# Altium PCB FCM_Integrated.PcbDoc (part 3 of 3)
Units mil, origin at the board's own origin, x right, y up, seen from the top; angles counter-clockwise.
Board outline 5855 x 4354 mil, 4 copper layers (Top Layer, Power, Ground, Bottom Layer), stack 23.756 mil thick; 164 components, 92 nets, 619 pads, 176 vias.
Unrouted connection lines stored in the file: 150.
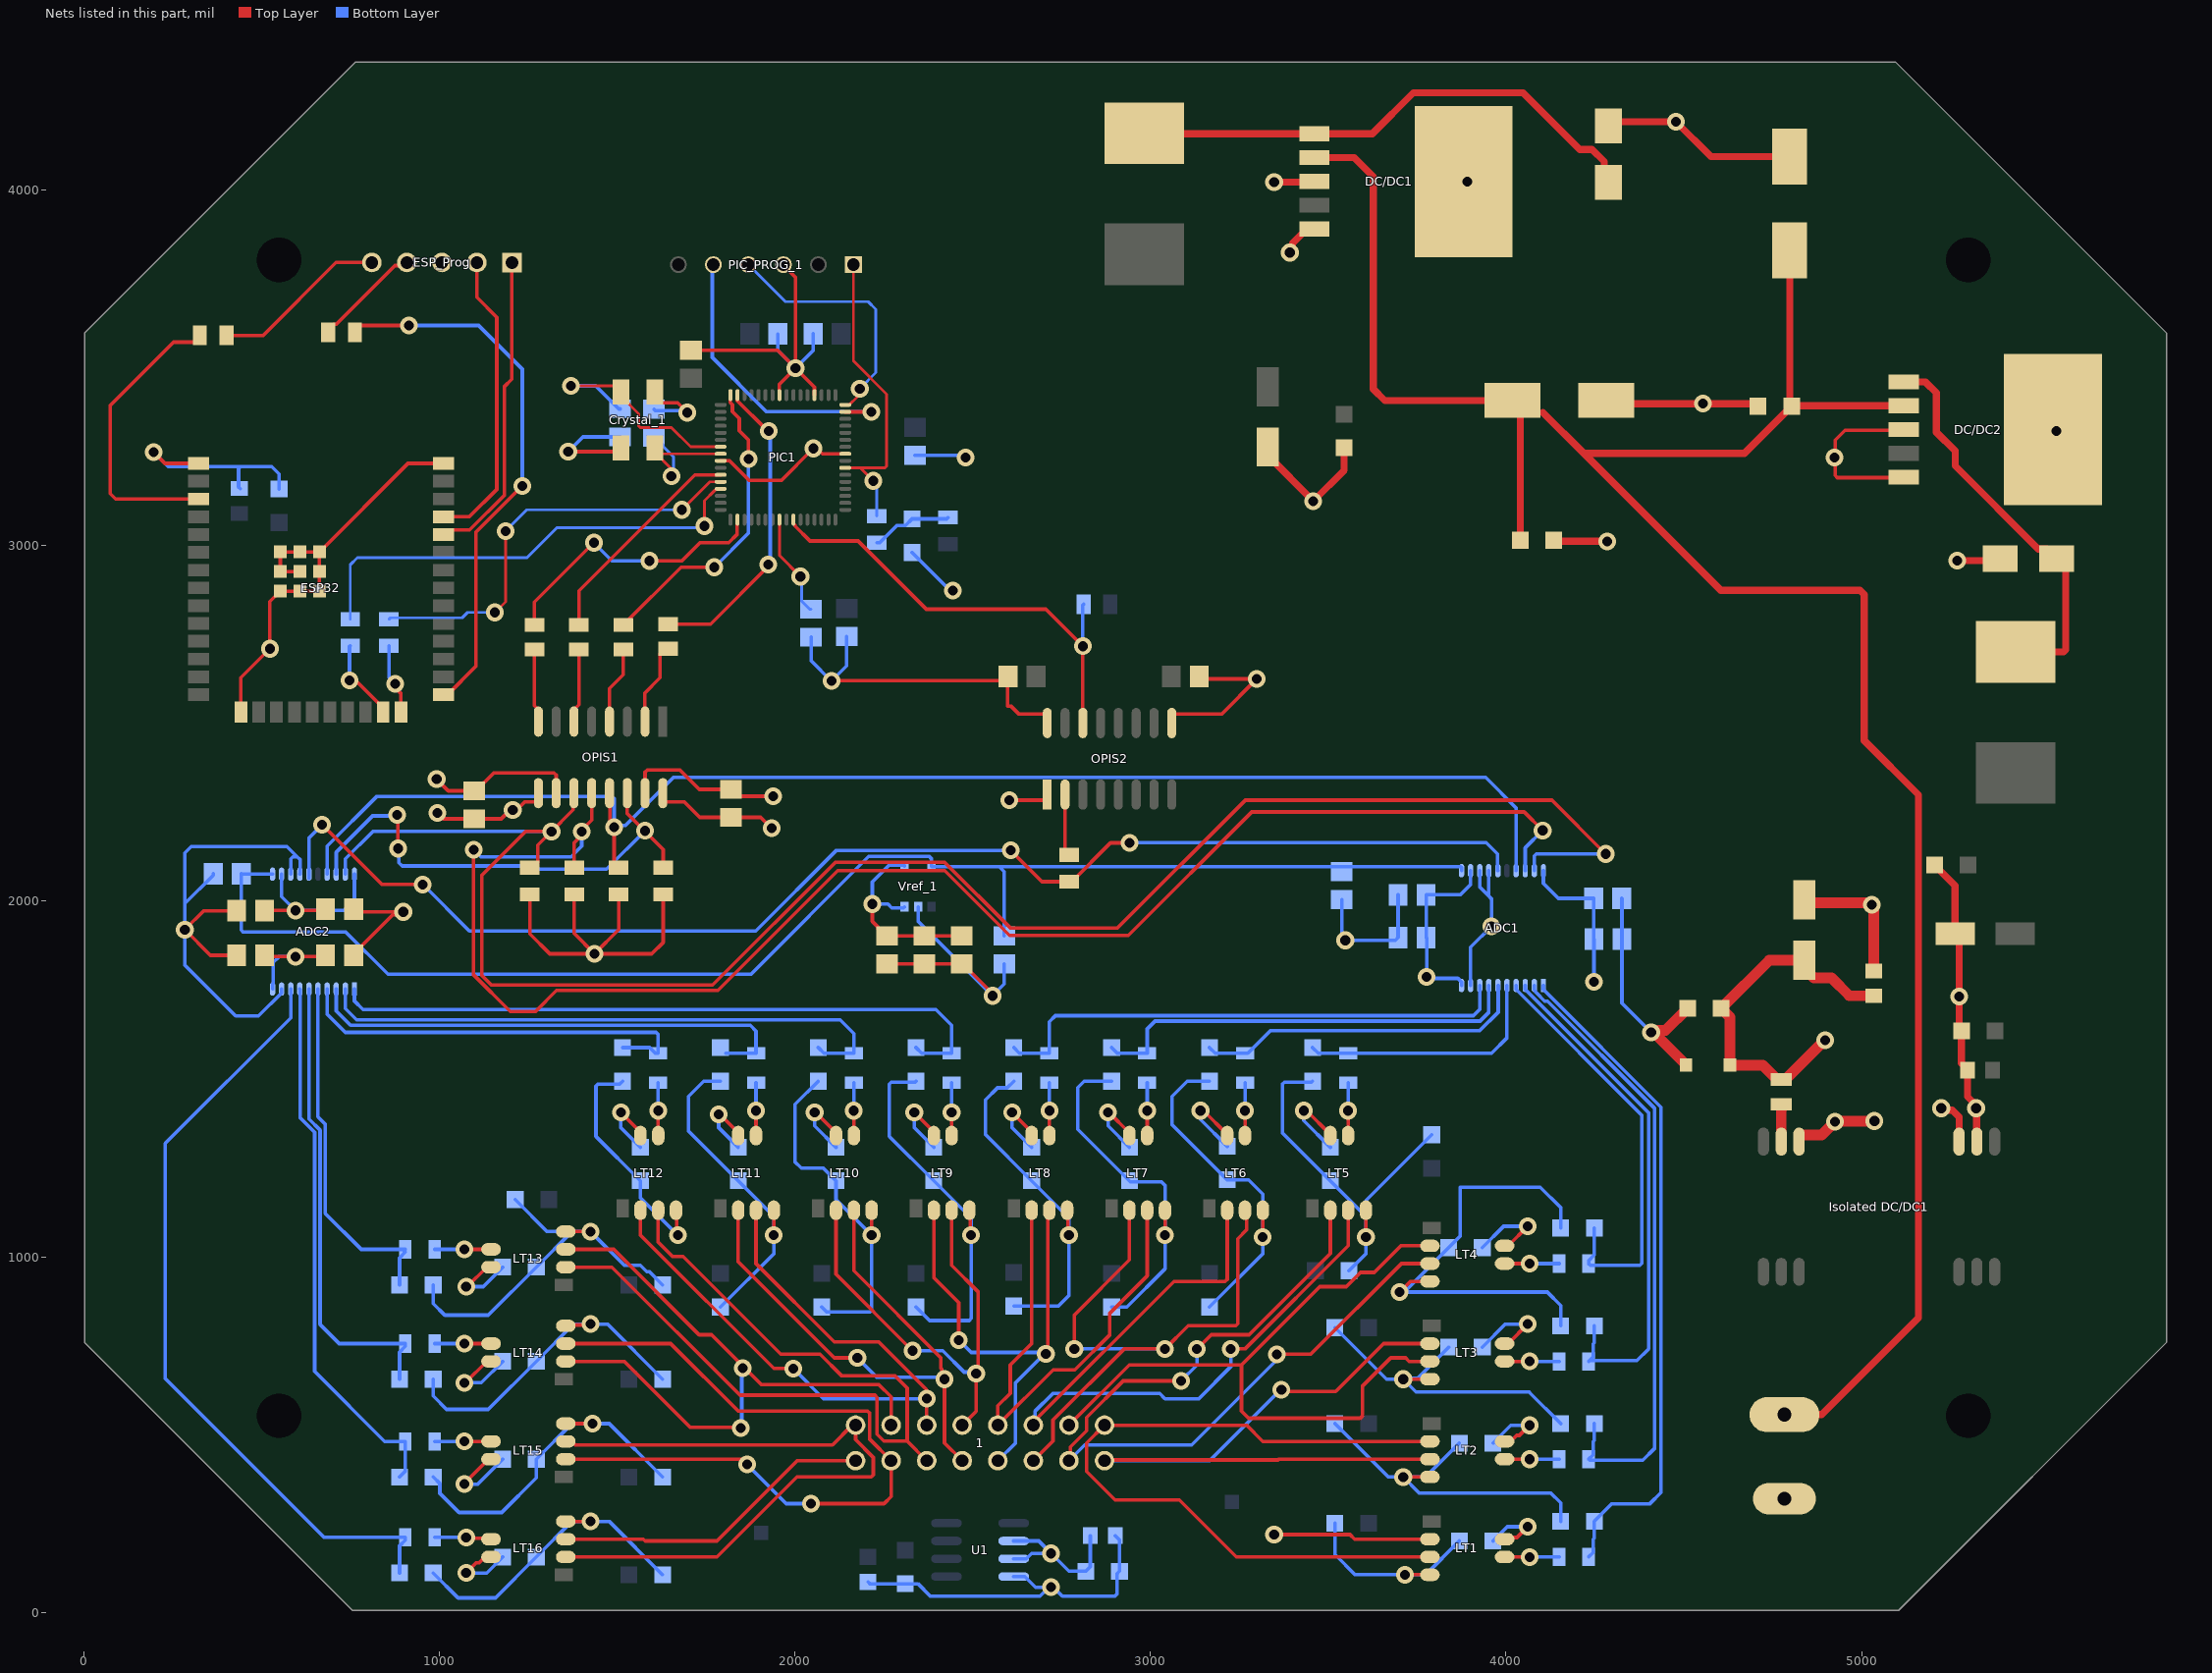
[diagram p4: the nets of this part, all layers, seen from the top]

## Via types
v1: diameter 50, hole 28, Top Layer to Bottom Layer, 176 vias

## Nets (pads, with @x,y where several pads share a name; then routed paths per layer and width w, separated by ;. In a path a pad name is that pad's centre, name@x,y a point inside that pad or via, vN(x,y) a via of type N, cw(c..) or ccw(c..) an arc to the next point about the centre after c; other vN are vias at no path point) (continued)
+5: *1.1 ADC1.10 ADC1.12 ADC1.20 ADC2.10 ADC2.12 ADC2.20 C1.1 C2.1 C3.2 C4.2 C5.2 C6.2 C10.1 C12.2 C13.2 C14.1 C15.1 C16.2 C17.2 C18.1 C19.1 C23.2 C26.2 C29.2 C32.2 C35.2 C38.2 C41.2 C44.2 C47.2 C49.2 C53.2 C55.2 C59.2 C61.2 C65.2 C67.2 C76.1 C77.1 C78.2 DIODE2.K LT1.7 LT2.7 LT3.7 LT4.7 LT5.7 LT6.7 LT7.7 LT8.7 LT9.7 LT10.7 LT11.7 LT12.7 LT13.7 LT14.7 LT15.7 LT16.7 OPIS1.10 OPIS1.15 OPIS2.1 R5.1 R6.1 R7.1 R8.1 U1.2 U1.3 Vref_1.3 Vref_1.4 | length 9463.3
  Top Layer w10: C15.1@509.37,1851.94 C15.1@509.37,1848 513.37,1844 v1(596,1844) 676.63,1844 C17.2@680.63,1848 ; C14.1@509.37,1973 510.37,1974 v1(596,1974) 676.63,1974 C16.2@680.63,1978 ; v1(993,2343) 1025.63,2310.37 C6.2@1099,2310.37 1102.94,2310.37 1153.57,2361 1323.14,2361 1329,2355.14 OPIS1.10@1329,2303.82 ; v1(1071,361) 1071,363.53 1138.47,431 LT15.7@1146,431 ; v1@1073.47,646 1133.47,706 LT14.7@1146,706 ; v1(1076,111) 1104.28,139.28 1112.46,139.28 1129.18,156 LT16.7@1146,156 ; v1(1076,916) 1078.47,916 1133.47,971 LT13.7@1146,971 ; R5.1@1255,2019 1255,1908 1311,1852 v1(1437,1852) ; R6.1@1380,2019 1380,1909 v1(1437,1852) ; R7.1@1505,2019 1505,1920 v1(1437,1852) ; v1(1511,1406) 1566,1351.03 LT12.7@1566,1341 ; OPIS1.15@1579,2303.82 1579,2363 1585,2369 1677,2369 1731.63,2314.37 1814,2314.37 1833.37,2295 v1(1939,2295) ; R8.1@1630,2019 1630,1884 1598,1852 v1(1437,1852) ; v1(1786,1401) 1788.53,1401 1841,1348.53 LT11.7@1841,1341 ; v1(2056,1406) 2058.53,1406 2116,1348.53 LT10.7@2116,1341 ; v1(2218,1992) 2218,1943.37 2233.49,1927.88 2233.49,1923.94 2255.06,1902.37 C13.2@2259,1902.37 C10.1@2364,1902.37 C12.2@2469,1902.37 ; v1(2336,1406) 2391,1351.03 LT9.7@2391,1341 ; v1(2603,2284) 2702.4,2284 2710,2291.6 OPIS2.1@2710,2299.82 ; v1(2611,1406) 2666,1351.03 LT8.7@2666,1341 ; v1(2881,1406) 2883.53,1406 2941,1348.53 LT7.7@2941,1341 ; v1@3149.29,1411 3216,1344.29 LT6.7@3216,1341 ; v1@3439.29,1411 3506,1344.29 LT5.7@3506,1341 ; LT1.7@3996,206 4000.78,210.78 4030.78,210.78 v1(4061,241) ; LT2.7@3996,481 4012.82,481 4029.54,497.72 4037.72,497.72 v1(4066,526) ; LT3.7@3996,756 4006.03,756 v1(4061,811) ; LT4.7@3996,1031 4006.03,1031 v1(4061,1086)
  Top Layer w30: v1(4897,1609) 4895.81,1609 4785.81,1499 *1.1@4774,1499 4762.19,1499 4722.19,1539 DIODE2.K@4629.94,1539 4629.94,1674.24 C78.2@4605.18,1699 4740.54,1834.35 C77.1@4839,1834.35 4839,1810.73 4865.5,1784.24 4915.32,1784.24 4965.56,1734 C76.1@5034,1734
  Bottom Layer w10: ADC2.10@531.46,1753 532.41,1753.95 532.41,1768.68 533,1769.27 533,1828 549,1844 v1(596,1844) ; ADC2.12@557.05,2075.83 557.05,2012.95 v1(596,1974) 732.77,1974 761.77,2003 ADC2.20@761.77,2075.83 ; v1(1071,361) 1108.76,361 C61.2@1178.76,431 ; v1(1071,646) 1118.76,646 C55.2@1178.76,706 ; v1(1076,111) 1133.76,111 C67.2@1178.76,156 ; v1(1076,916) 1123.76,916 C49.2@1178.76,971 ; v1(1511,1406) 1511,1363.24 C65.2@1566,1308.24 ; v1(1786,1401) 1786,1363.24 C59.2@1841,1308.24 ; v1(2056,1406) 2056,1368.24 C53.2@2116,1308.24 ; Vref_1.3@2309,1984 2306,1981 2273,1981 2262,1992 v1(2218,1992) 2218,2054 2266,2102 2306,2102 Vref_1.4@2309,2099 ; v1(2336,1406) 2336,1363.24 C47.2@2391,1308.24 ; v1(2611,1406) 2611,1363.24 C44.2@2666,1308.24 ; U1.3@2615.49,151 2650.67,151 2665.67,166 v1(2721,166) ; U1.2@2615.49,201 2686,201 v1(2721,166) ; C18.1@2831,216 2831,128.24 C19.1@2818.76,116 2771,116 v1(2721,166) ; v1(2881,1406) 2881,1368.24 C41.2@2941,1308.24 ; v1@3149.29,1411 v1(3141,1411) 3141,1386 C38.2@3216,1311 ; v1@3439.29,1411 v1(3431,1411) 3431,1383.24 C35.2@3506,1308.24 ; ADC1.10@3874.82,1763 3874.82,1772.88 3864.7,1783 3775.37,1783 v1(3777,1787) 3777,1896.37 C2.1@3775.37,1898 C4.2@3775.37,2018 3872,2018 3900.41,2046.41 ADC1.12@3900.41,2085.83 ; C29.2@3933.24,746 3998.24,811 v1(4061,811) ; C32.2@3933.24,1026 3993.24,1086 v1(4061,1086) ; C23.2@3963.24,201 4003.24,241 v1(4061,241) ; C26.2@3963.24,476 4013.24,526 v1(4066,526) ; ADC1.20@4105.13,2085.83 4105.13,2049.87 4147,2008 C3.2@4246.63,2008 4246.63,1893.63 C1.1@4247.26,1893 v1(4247.26,1773)
+12: C70.2 C71.1 C79.2 C80.1 DC/DC1.2 DC/DC2.2 J1.1 | length 6683.3
  Top Layer w20: DC/DC1.2@3460.92,4090.93 3573,4090.93 3627,4036.93 3627,3440 3659,3408 C71.1@4018.22,3408 ; C70.2@4039.76,3015 4040,3015 C71.1@4040,3408 ; 4103.75,3374.25 4219,3259 ; J1.1@4783,556.2 4888,556.2 5160,828.2 5160,2299 5007,2452 5007,2862.49 4995.28,2874.21 4603.79,2874.21 4219,3259 ; C80.1@4798,3830 4798,3392 C79.2@4803.25,3392 ; DC/DC2.2@5117.92,3392.93 4804.17,3392.93 C79.2@4803.25,3392 ; 4219,3259 4670.25,3259 C79.2@4803.25,3392
CathH1: OPIS1.2 R4.1 | length 237.4
  Top Layer w10: OPIS1.2@1579,2505 1578,2506 1578,2585 1621.44,2628.44 1621.44,2695.31 1636.13,2710 R4.1@1644,2710
CathH2: OPIS1.4 R3.1 | length 219
  Top Layer w10: OPIS1.4@1479,2505 1479,2598 1517.94,2636.94 R3.1@1517.94,2707.91
CathH3: OPIS1.6 R2.1 | length 208.7
  Top Layer w10: OPIS1.6@1379,2505 1379,2539.03 1392.94,2552.97 R2.1@1392.94,2707.91
CathH4: OPIS1.8 R1.1 | length 207.5
  Top Layer w10: R1.1@1267.94,2707.91 1267.94,2550.1 1279,2539.03 OPIS1.8@1279,2505
CathL1: OPIS2.2 R11.2 | length 174.4
  Top Layer w10: OPIS2.2@2760,2299.82 2760,2141 R11.2@2771,2130
Cell_1_Voltage: ADC1.1 C24.2 R16.2 | length 1891
  Bottom Layer w10: ADC1.1@4105.13,1763 4105.13,1751.78 4436,1420.91 4436,336.86 4404.88,305.74 4297.98,305.74 C24.2@4248.24,256 4248.24,208.58 4245.05,205.39 4245.05,168.72 R16.2@4232.34,156
Cell_2_Voltage: ADC1.2 C27.2 R17.2 | length 1753.4
  Bottom Layer w10: ADC1.2@4079.54,1763 4079.54,1750.44 4082.02,1747.96 4082.02,1745.98 4087.65,1740.35 4087.65,1740.16 4108.81,1719 4116.7,1719 4417.35,1418.35 4417.35,460.35 4385,428 4235.34,428 R17.2@4232.34,431 4245.05,443.72 4245.05,480.39 4248.24,483.58 C27.2@4248.24,531
Cell_3_Voltage: ADC1.3 C30.2 R18.2 | length 1452.7
  Bottom Layer w10: ADC1.3@4053.95,1763 4053.95,1751.78 4401,1404.73 4401,741 4368,708 R18.2@4234.34,708 ; R18.2@4232.34,706 R18.2@4234.34,708 ; C30.2@4248.24,806 4248.24,758.58 4245.05,755.39 4245.05,718.72 R18.2@4234.34,708
Cell_4_Voltage: ADC1.4 C33.2 R19.2 | length 1188.4
  Bottom Layer w10: ADC1.4@4028.36,1763 4028.36,1751.78 4382,1398.14 4382,981.86 4376.14,976 4237.34,976 R19.2@4232.34,981 4232.34,988.87 4248.24,1004.78 C33.2@4248.24,1081
Cell_5_Voltage: ADC1.5 C36.2 R20.2 | length 718.6
  Bottom Layer w10: C36.2@3456,1588.24 3471.91,1572.34 R20.2@3556,1572.34 3959.34,1572.34 4002.77,1615.77 ADC1.5@4002.77,1763
Cell_6_Voltage: ADC1.6 C39.2 R21.2 | length 941.9
  Bottom Layer w10: C39.2@3166,1588.24 3181.91,1572.34 R21.2@3266,1572.34 3273.87,1572.34 3337.99,1636.46 3926.6,1636.46 3978,1687.86 3978,1762.18 ADC1.6@3977.18,1763
Cell_7_Voltage: ADC1.7 C42.2 R22.2 | length 1230.5
  Bottom Layer w10: C42.2@2891,1588.24 2906.91,1572.34 R22.2@2991,1572.34 2991,1641 3013,1663 3927,1663 3951.59,1687.59 ADC1.7@3951.59,1763
Cell_8_Voltage: ADC1.8 C45.2 R23.2 | length 1486.7
  Bottom Layer w10: C45.2@2616,1588.24 2631.91,1572.34 R23.2@2716,1572.34 2716,1661 2733,1678 3908,1678 3926,1696 ADC1.8@3926,1763
Cell_9_Voltage: ADC2.1 C50.2 R24.2 | length 1926.5
  Bottom Layer w10: ADC2.1@761.77,1753 761.77,1719.3 785.92,1695.15 2396.85,1695.15 2441,1651 R24.2@2441,1572.34 2356.91,1572.34 C50.2@2341,1588.24
Cell_10_Voltage: ADC2.2 C56.2 R26.2 | length 1676.2
  Bottom Layer w10: ADC2.2@736.18,1753 736.18,1697.82 768,1666 2128,1666 2166,1628 R26.2@2166,1572.34 2081.91,1572.34 C56.2@2066,1588.24
Cell_11_Voltage: ADC2.3 C62.2 R28.2 | length 1412.1
  Bottom Layer w10: ADC2.3@710.59,1753 710.59,1691.41 751,1651 1875,1651 1891,1635 R28.2@1891,1572.34 C62.2@1806.91,1572.34
Cell_12_Voltage: ADC2.4 C68.2 R30.2 | length 1184.9
  Bottom Layer w10: ADC2.4@685,1753 685,1682 736,1631 1610.14,1631 1616,1625.14 R30.2@1616,1572.34 1608.13,1572.34 1592.22,1588.24 C68.2@1516,1588.24
Cell_13_Voltage: ADC2.5 C51.2 R25.2 | length 1010.6
  Bottom Layer w10: ADC2.5@659.41,1753 659,1752.59 659,1394 680,1373 680,1122 781,1021 R25.2@904.66,1021 ; C51.2@888.76,921 888.76,997.22 904.66,1013.13 R25.2@900.73,1017.06
Cell_14_Voltage: ADC2.6 C57.2 R27.2 | length 1324.5
  Bottom Layer w10: ADC2.6@633.82,1753 633.82,1387.4 665,1356.21 665,810 719,756 R27.2@904.66,756 904.66,748.13 888.76,732.22 C57.2@888.76,656
Cell_15_Voltage: ADC2.7 C63.2 R29.2 | length 1535.2
  Bottom Layer w10: ADC2.7@608.23,1753 609,1752.23 609,1391 650,1350 650,678 847,481 R29.2@904.66,481 904.66,396.91 C63.2@888.76,381
Cell_16_Voltage: ADC2.8 C69.2 R31.2 | length 2207.5
  Bottom Layer w10: ADC2.8@582.64,1753 582.64,1671.64 230,1319 230,658 677,211 R31.2@904.66,211 904.66,203.13 888.76,187.22 C69.2@888.76,111
Chipsel1_HS: ADC1.18 OPIS1.12 R6.2 | length 4534.8
  Top Layer w10: v1(1097,2145) 1097,1792.79 1199.79,1690 1271,1690 1330,1749 1784,1749 2121,2086 2422,2086 2604,1904 2938,1904 3285,2251 4051,2251 v1(4103,2199) ; R6.2@1380,2094 1380,2164.43 1405,2189.43 1405,2204.57 1429,2228.57 OPIS1.12@1429,2303.82
  Bottom Layer w10: v1(1097,2145) 1117,2125 1371,2125 1401,2155 v1(1401,2196) ; ADC1.18@4053.95,2085.83 4053.95,2149.95 v1(4103,2199)
Chipsel1_LS: PIC1.43 R2.2 | length 629.8
  Top Layer w10: R2.2@1392.94,2776.81 1392.94,2872.94 1718.95,3198.95 PIC1.43@1791.61,3198.95
Chipsel2_HS: ADC2.18 OPIS1.14 R8.2 | length 1475.8
  Top Layer w10: v1(882,2243) 883.5,2241.5 883.5,2149.5 v1(885,2148) ; OPIS1.14@1529,2303.82 1529,2246 ; v1(1579,2198) 1529,2246 ; R8.2@1630,2094 1630,2145 1529,2246
  Bottom Layer w10: ADC2.18@710.59,2075.83 710.59,2137.59 813,2240 v1@880,2240 ; v1(885,2148) 887,2146 887,2108 896,2099 1261.41,2099 1270.41,2090 1471,2090 v1(1579,2198)
Chipsel2_LS: PIC1.31 R4.2 | length 873.1
  Top Layer w10: R4.2@1644,2778.9 1762.9,2778.9 1932,2948 v1@1931,2949 ; PIC1.31@1837.32,3417.95 1837.32,3408.68 v1@1920,3326
  Bottom Layer w10: v1@1920,3326 1930,3326 1931,3325 v1@1931,2949
  other v1: 1925,2947 1927,3322
D_CLK_LS: PIC1.50 R1.2 | length 791.6
  Top Layer w10: R1.2@1267.94,2776.81 1267.94,2840.94 v1(1434.95,3007.95) ; v1(1591,2957) 1682.6,2957 1733.55,3007.95 1814.33,3007.95 1837.32,3030.94 1837.32,3065.43 PIC1.50@1839.24,3067.34
  Bottom Layer w10: v1(1434.95,3007.95) 1485.9,2957 v1(1591,2957)
D_In_HS: ADC1.17 ADC2.17 OPIS1.13 R7.2 | length 4053.4
  Top Layer w10: OPIS1.13@1479,2303.82 1480.33,2302.49 1480.33,2216.49 1492,2204.82 1492,2107 R7.2@1505,2094
  Bottom Layer w10: ADC2.17@685,2075.83 685,2155 824,2294 1486.14,2294 1492,2288.14 v1(1492,2208) 1496.78,2212.78 1523.78,2212.78 1659,2348 3943,2348 4028,2263 4028,2086.2 ADC1.17@4028.36,2085.83
D_in_LS: PIC1.32 R3.2 | length 863.4
  Top Layer w10: R3.2@1517.94,2776.81 1680.1,2938.98 v1(1774.1,2938.98) ; PIC1.32@1818.16,3417.95 1818.16,3402.4 1824.82,3395.74 1824.82,3376.81 1844,3357.63 1844,3323.14 1869.89,3297.25 v1(1869.89,3243.61)
  Bottom Layer w10: v1(1774.1,2938.98) 1869.89,3034.77 v1(1869.89,3243.61)
D_out_HS: ADC1.15 ADC2.15 R11.1 | length 3831.6
  Top Layer w10: v1(671,2215) 839,2047 v1(954,2047) ; v1(2607,2143) 2695,2055 R11.1@2771,2055 2778.87,2055 2887.87,2164 v1(2941,2164)
  Bottom Layer w10: ADC2.15@633.82,2064.61 ADC2.15@633.82,2075.83 633.82,2177.82 v1(671,2215) ; v1(954,2047) 1085,1916 1890.33,1916 2117.33,2143 v1(2607,2143) ; v1(2941,2164) 2942,2165 3943.95,2165 3976,2132.95 3976,2101.74 3976.23,2101.51 3976.23,2086.78 ADC1.15@3977.18,2085.83
D_out_L: OPIS2.14 PIC1.58 R9.1 | length 1303.8
  Top Layer w10: PIC1.58@1996.33,3072.96 1996.33,3061.46 2000.5,3057.29 2000.5,3055.31 2042.82,3013 2178,3013 2370,2821 2706,2821 v1(2810,2717) OPIS2.14@2810,2501
  Bottom Layer w10: v1(2810,2717) 2810,2833 R9.1@2812,2835
DCLK_HS: ADC1.19 ADC2.19 OPIS1.11 R5.2 | length 5295.4
  Top Layer w10: R5.2@1255,2094 1262.87,2094 1277.56,2108.69 1277.56,2157.56 v1(1316,2196) ; OPIS1.11@1379,2303.82 1376.43,2301.25 1376.43,2257.43 1342,2223 1342,2222 v1(1316,2196) ; v1(4280,2133) 4129,2284 3267,2284 2908,1925 2606,1925 2422,2109 2114,2109 1769,1764 1147,1764 1120,1791 1120,2073 1243,2196 v1(1316,2196)
  Bottom Layer w10: ADC2.19@736.18,2075.83 736.18,2119 813.18,2196 v1(1316,2196) ; ADC1.19@4079.54,2085.83 4079.54,2127.14 4085.4,2133 v1(4280,2133)
ESP_Boot_D: ESP32.25 R32.1 | length 1546.2
  Top Layer w10: R32.1@763,3600 763,3604.31 777.69,3619 v1(915,3619) ; ESP32.25@1012,2581 1023.81,2581 1103,2660.19 1103,3037 v1(1234,3168)
  Bottom Layer w10: v1(915,3619) 1111,3619 1234,3496 v1(1234,3168)
ESP_Boot_P: ESP_Prog.4 R32.2 | length 306.9
  Top Layer w10: R32.2@688,3600 688,3607.87 702.69,3622.56 710.56,3622.56 875.39,3787.39 900.54,3787.39 ESP_Prog.4@909.15,3796
ESP_Enable_D: ESP32.3 R15.2 | length 838.4
  Top Layer w10: ESP32.3@323.02,3131 90,3131 75,3146 75,3394 253,3572 312.31,3572 327,3586.69 R15.2@327,3591
ESP_Enable_P: ESP_Prog.5 R15.1 | length 493.6
  Top Layer w10: R15.1@402,3591 505.12,3591 710.12,3796 ESP_Prog.5@810.72,3796
ESP_TX_BOOT: ESP32.35 ESP_Prog.2 | length 843.1
  Top Layer w10: ESP32.35@1012,3081 1085,3081 1162,3158 1162,3642 1106,3698 ESP_Prog.2@1106,3796
ESPout-PICin: PIC1.44 R10.2 | length 1209.2
  Top Layer w8: v1(1157,2812) 1187,2842 v1(1187,3041) ; v1(1682.6,3100.52) 1761.34,3179.26 PIC1.44@1791.61,3179.26
  Bottom Layer w8: R10.2@859,2793 863,2797 1065,2797 1080,2812 v1(1157,2812) ; v1(1187,3041) 1246.52,3100.52 v1(1682.6,3100.52)
GND: 
GND_H: "Isolated DC/DC1.4" ADC1.9 ADC1.13 ADC1.14 ADC2.9 ADC2.13 ADC2.14 C1.2 C2.2 C3.1 C4.1 C5.1 C6.1 C10.2 C11.1 C12.1 C13.1 C14.2 C15.2 C16.1 C17.1 C18.2 C19.2 C20.1 C21.2 C22.1 C23.1 C24.1 C25.1 C26.1 C27.1 C28.1 C29.1 C30.1 C31.1 C32.1 C33.1 C34.1 C35.1 C36.1 C37.1 C38.1 C39.1 C40.1 C41.1 C42.1 C43.1 C44.1 C45.1 C46.1 C47.1 C48.1 C49.1 C50.1 C51.1 C52.1 C53.1 C54.1 C55.1 C56.1 C57.1 C58.1 C59.1 C60.1 C61.1 C62.1 C63.1 C64.1 C65.1 C66.1 C67.1 C68.1 C69.1 C76.2 C77.2 C78.1 C93.1 C94.1 DIODE2.A LT1.2 LT1.4 LT2.4 LT3.4 LT4.4 LT5.4 LT6.4 LT7.4 LT8.4 LT9.4 LT10.4 LT11.4 LT12.4 LT13.4 LT14.4 LT15.4 LT16.4 OPIS1.9 OPIS1.16 U1.4 Vref_1.2 | length 22721.8
  Top Layer w10: C15.2@430.63,1848 357,1848 v1(285,1920) 338,1973 C14.2@430.63,1973 ; C17.1@759.37,1848 759.37,1851.94 869.78,1962.35 891.35,1962.35 v1(899,1970) 767.37,1970 C16.1@759.37,1978 ; v1(995,2248) 1011.37,2231.63 C6.1@1099,2231.63 1174.8,2231.63 1199.17,2256 v1(1207,2256) 1217.77,2256 1240.67,2278.9 1271.98,2278.9 1279,2285.92 OPIS1.9@1279,2303.82 ; LT16.4@1356,256 v1(1426,256) ; LT15.4@1356,531 v1(1431,531) ; LT14.4@1356,806 1358.5,808.5 1423.5,808.5 v1(1426,811) ; LT13.4@1356,1071 v1(1426,1071) ; OPIS1.16@1629,2303.82 1629,2285.92 1636.02,2278.9 1689.67,2278.9 1732.93,2235.63 C5.1@1820,2235.63 1904.37,2235.63 v1(1935,2205) ; LT12.4@1666,1131 1668.5,1128.5 v1@1668.5,1063.5 ; v1(1941,1061) LT11.4@1941,1131 ; v1(2216,1061) LT10.4@2216,1131 ; C13.1@2259,1823.63 C10.2@2364,1823.63 C12.1@2469,1823.63 2472.94,1823.63 v1@2556,1740.57 ; LT9.4@2491,1131 2493.5,1128.5 2493.5,1063.5 v1(2496,1061) ; LT8.4@2766,1131 2768.5,1128.5 2768.5,1063.5 v1(2771,1061) ; v1(3041,1061) LT7.4@3041,1131 ; v1(3316,1056) LT6.4@3316,1131 ; v1(3348,219) 3561.33,219 3574.33,206 LT1.2@3786,206 ; v1(3606,1056) LT5.4@3606,1131 ; v1(3701,901) 3731,931 LT4.4@3786,931 ; v1(3711,381) LT2.4@3786,381 ; v1(3711,656) LT3.4@3786,656 ; v1(3716,106) LT1.4@3786,106
  Top Layer w30: DIODE2.A@4505.93,1539 4505.93,1539.98 4414.91,1631 v1(4408,1631) 4413.31,1636.31 4448,1636.31 C78.1@4510.69,1699 ; 4824,1324 4824,1332.69 4833.93,1342.62 4887.62,1342.62 v1(4925,1380) 4926,1381 5035,1381 v1(5036,1382) ; C77.2@4839,2003.65 4846.65,1996 5022,1996 5034,1984 C76.2@5034,1804
  Bottom Layer w10: C94.1@364.63,2077 364.63,2073.06 285,1993.43 ; ADC2.9@557.05,1753 557.05,1741.78 492.27,1677 428,1677 285,1820 v1(285,1920) 285,1993.43 ; ADC2.13@582.64,2075.83 582.64,2119.14 588.5,2125 601,2125 ; ADC2.14@608.23,2075.83 609,2076.61 609,2117 601,2125 ; C69.1@983.24,111 1053.24,41 1158.24,41 C67.1@1273.24,156 1373.24,256 v1(1426,256) 1478.24,256 C66.1@1628.24,106 ; C63.1@983.24,381 1001.87,362.38 1001.87,335.13 1056,281 1176,281 1273.24,378.24 C61.1@1273.24,431 1373.24,531 v1(1431,531) 1478.24,531 C60.1@1628.24,381 ; C57.1@983.24,656 983.24,608.76 1021,571 1138.24,571 C55.1@1273.24,706 1378.24,811 v1(1426,811) 1473.24,811 C54.1@1628.24,656 ; C51.1@983.24,921 983.24,868.76 1016,836 1138.24,836 C49.1@1273.24,971 1373.24,1071 ; C64.1@1213.76,1161 1303.76,1071 1373.24,1071 ; C68.1@1516,1493.76 1508.24,1486 1446.86,1486 1441,1480.14 1441,1338.76 C65.1@1566,1213.76 1566,1166 v1(1671,1061) ; C48.1@1628.24,921 1591.43,957.81 1584.19,957.81 1566,976 1521,976 v1(1426,1071) 1373.24,1071 ; C58.1@1791,858.76 1941,1008.76 v1(1941,1061) 1941,1113.76 C59.1@1841,1213.76 1701,1353.76 1701,1451 1743.76,1493.76 C62.1@1791,1493.76 ; C56.1@2066,1493.76 2001,1428.76 2001,1266.86 2018.24,1249.62 2080.14,1249.62 C53.1@2116,1213.76 2116,1161 v1(2216,1061) 2216,851 2216.86,850.14 2211.86,845.14 2089.61,845.14 C52.1@2076,858.76 ; C21.2@2206,86 2211.25,80.75 C20.1@2311,80.75 2346.25,80.75 2381,46 2689.43,46 v1@2714.43,71 ; C46.1@2341,858.76 2378.76,821 2490.14,821 2496,826.86 v1(2496,1061) 2496,1108.76 C47.1@2391,1213.76 2266,1338.76 2266,1485.14 2271.86,1491 2338.24,1491 C50.1@2341,1493.76 ; Vref_1.2@2347,1984 2347,1943 v1(2556,1734) ; v1@2556,1740.57 v1(2556,1734) ; C11.1@2589,1823.63 2589,1767 v1(2556,1734) ; U1.4@2615.49,101 2646.98,101 2676.98,71 v1@2714.43,71 ; C43.1@2616,861.51 2741.51,861.51 2771,891 v1(2771,1061) 2771,1108.76 C44.1@2666,1213.76 2536,1343.76 2536,1441 2570.13,1475.13 2597.38,1475.13 C45.1@2616,1493.76 ; C40.1@2891,858.76 2933.76,858.76 3041,966 v1(3041,1061) 3041,1201 3031,1211 2943.76,1211 C41.1@2941,1213.76 2796,1358.76 2796,1476 2813.76,1493.76 C42.1@2891,1493.76 ; C18.2@2901,216 2913.24,203.76 C19.2@2913.24,116 2906,108.76 2906,51.86 2900.14,46 2752.57,46 2727.57,71 v1(2721,71) v1@2714.43,71 ; C37.1@3166,858.76 3316,1008.76 v1(3316,1056) 3316,1176 3276,1216 3216.51,1216 C38.1@3216,1216.51 3061,1371.51 3061,1451 3103.76,1493.76 C39.1@3166,1493.76 ; C36.1@3456,1493.76 3453.24,1491 3376.86,1491 3371,1485.14 3371,1348.76 C35.1@3506,1213.76 3606,1113.76 ; C22.1@3518.76,251 3518.76,163.24 3576,106 v1(3716,106) 3773.76,106 C23.1@3868.76,201 ; C25.1@3518.76,531 3668.76,381 v1(3711,381) ; C28.1@3518.76,801 3663.76,656 v1(3711,656) ; C93.1@3538,2004.63 3538,1895.86 v1(3548,1890) 3688.63,1890 C2.2@3696.63,1898 C4.1@3696.63,2018 ; C34.1@3558.24,961 3606,1008.76 v1(3606,1056) 3606,1113.76 ; C31.1@3791,1343.24 3606,1158.24 3606,1113.76 ; C29.1@3838.76,746 3751,658.24 3713.24,658.24 v1(3711,656) ; C26.1@3868.76,476 3773.76,381 v1(3711,381) ; ADC1.9@3900.41,1763 3900.41,1870.41 v1(3959,1929) 3959,2006.67 3951.59,2014.08 ; ADC1.13@3926,2085.83 3926,2039.67 3951.59,2014.08 ; ADC1.14@3951.59,2085.83 3951.59,2014.08 ; C24.1@4153.76,256 4153.76,308.24 4126,336 3756,336 v1(3711,381) ; C27.1@4153.76,531 4066,618.76 4066,620.14 3746.86,620.14 v1(3711,656) ; C30.1@4153.76,806 4153.76,863.24 4116,901 v1(3701,901) 3708.65,908.65 3721.41,908.65 C32.1@3838.76,1026 3871,1058.24 3871,1196 4096,1196 4153.76,1138.24 C33.1@4153.76,1081 ; C3.1@4325.37,2008 4326,2007.37 C1.2@4326,1893 4326,1713 v1(4408,1631) ; 285,1993.43 285,2136 303,2154 572,2154 601,2125
  other v1: 5029,1990
GND_L: "Isolated DC/DC1.2" "Isolated DC/DC1.3" C7.2 C8.1 C9.1 C70.1 C71.2 C72.2 C73.1 C74.2 C75.1 C79.1 C80.2 C81.2 C82.1 C83.2 C84.2 C85.2 C86.2 C87.1 C88.2 C89.1 C90.1 C91.2 C92.1 Crystal_1.2 Crystal_1.4 DC/DC1.3 DC/DC1.5 DC/DC1.6 DC/DC2.3 DC/DC2.5 DC/DC2.6 DIODE1.A DIODE3.A ESP32.1 ESP32.15 ESP32.38 ESP32.39 ESP_Prog.3 J1.2 OPIS2.9 OPIS2.16 pad.2 pad.3 PIC1.9 PIC1.20 PIC1.25 PIC1.41 PIC_PROG_1.3 | length 9006.9
  Top Layer w10: v1(197,3263) 229,3231 ESP32.1@323.02,3231 ; ESP32.15@442.51,2531.79 442.51,2628.51 v1(524,2710) 524,2842.61 ESP32.39@553.34,2871.94 ESP32.39@608.46,2871.94 ESP32.39@663.57,2871.94 ESP32.39@663.57,2927.06 ESP32.39@663.57,2982.18 ; ESP32.39@608.46,2927.06 ESP32.39@553.34,2927.06 ESP32.39@553.34,2982.18 ESP32.39@608.46,2982.18 ESP32.39@663.57,2982.18 ; ESP32.38@1012,3231 912.39,3231 ESP32.39@663.57,2982.18 ; v1(1363,3264) 1501.5,3264 Crystal_1.2@1511.76,3274.26 ; Crystal_1.4@1606.24,3431.74 1606.24,3419.93 1624.87,3401.31 1670.87,3401.31 v1@1693.18,3379 ; C92.1@1708,3549.37 1951.63,3549.37 v1(2002,3499) ; PIC1.41@1791.61,3238.32 1791.8,3238.12 1816.88,3238.12 1872,3183 1962,3183 v1(2052,3273) 2062.82,3273 2077.82,3258 PIC1.9@2142,3258 ; PIC1.25@1956.96,3423.35 1956.96,3453.96 v1(2002,3499) ; PIC_PROG_1.3@1968,3790 1968,3788.07 2002,3754.07 v1(2002,3499) ; PIC1.20@2055.39,3423.35 2055.19,3423.55 2055.19,3445.81 v1(2002,3499) ; v1(2104,2620) 2587.63,2620 C9.1@2598,2630.37 ; C9.1@2599.63,2632 C9.1@2598,2630.37 ; OPIS2.16@2710,2501 2710,2518.9 2702.98,2525.92 2630.9,2525.92 2608.82,2548 2598,2548 C9.1@2598,2630.37 ; OPIS2.9@3060,2501 3060,2518.9 3067.02,2525.92 3199.92,2525.92 v1(3299,2625) 3144.37,2625 C8.1@3137.37,2632 ; C70.1@4134.24,3015 C70.1@4137.24,3012 ; DC/DC2.5@5117.92,3192.14 5116.78,3191 4931.86,3191 4926,3196.86 4926,3297 4953,3324 5115.92,3324 DC/DC2.3@5117.92,3326 ; DIODE3.A@5385,2958 DIODE3.A@5390,2963
  Top Layer w20: C72.2@3330,3277.36 3330,3253.73 3458,3125.73 v1(3458,3125) 3545,3212 C73.1@3545,3274.76 ; v1(3348,4022) 3458.92,4022 DC/DC1.3@3460.92,4024 ; v1(3392,3824) 3399.65,3831.65 3399.65,3850.33 3439.46,3890.14 DC/DC1.5@3460.92,3890.14 ; C70.1@4137.24,3012 v1(4285,3012) ; C71.2@4282,3408 4291,3399 v1(4554,3399) 4701.76,3399 C79.1@4708.76,3392 ; DIODE1.A@4288,4180 4300,4192 v1(4478,4192) 4576.22,4093.78 C80.2@4798,4093.78 ; C82.1@5204.76,2102 5262.71,2044.05 C81.2@5262.71,1909 5274,1897.71 v1(5274,1732) 5274,1641.82 C75.1@5280.82,1635 5280.82,1545.2 5298.06,1527.95 C74.2@5298.06,1525 5298.06,1450.63 5322,1426.69 v1(5322,1418) 5323,1417 5323,1325 5324,1324 ; v1(5224,1418) 5229.74,1412.26 5254.92,1412.26 5274,1393.18 5274,1324 ; v1(5269,2958) DIODE3.A@5385,2958
  Bottom Layer w10: v1(197,3263) 238,3222 441.86,3222 ; C83.2@440.95,3160 436,3164.95 436,3216.14 441.86,3222 ; C7.2@550,3159.24 550,3201 529,3222 441.86,3222 ; v1(1363,3264) 1404.63,3305.63 C87.1@1509.02,3305.63 ; C86.2@1604.02,3383.37 1608.39,3379 v1@1693.18,3379 ; C90.1@1952.37,3595 1952.37,3548.63 v1(2002,3499) 2051.63,3548.63 C91.2@2051.63,3596 ; C88.2@2046,2742.63 2046,2676 2103,2619 v1(2104,2620) 2146,2662 C89.1@2146,2744.63 ; C84.2@2330,2980.51 2436.9,2873.62 v1(2444.7,2873.62) ; C85.2@2338,3253.63 2474.37,3253.63 v1(2480,3248)
  other v1: 4924,3248 5548,3322 1698,3374 3891,4023
MCLR: PIC1.7 PIC_PROG_1.1 R14.2 | length 878.2
  Top Layer w8: PIC1.7@2142,3218.63 2184.37,3218.63 ; PIC_PROG_1.1@2164.85,3790 2164.85,3519.23 2258,3426.08 2258,3223.32 2253.31,3218.63 2184.37,3218.63 ; v1(2221,3182) 2184.37,3218.63
  Bottom Layer w8: v1(2221,3182) 2231,3172 R14.2@2231,3083
Net1_1: 1.1 LT1.3 LT2.2 | length 2149.7
  Top Layer w10: LT1.3@3786,156 3241.67,156 3081.67,316 2901,316 2821,396 2821,476.67 1.1@2871,526.67 3270.33,526.67 3316,481 LT2.2@3786,481
Net1_2: 1.2 LT2.3 LT3.2 | length 1988.5
  Top Layer w10: 1.2@2871,426.67 2873.17,428.84 3358.84,428.84 3361,431 LT2.3@3786,431 ; v1@3371,631 3366,621 3521,621 3656,756 LT3.2@3786,756
  Bottom Layer w10: 1.2@2871,426.67 3166.67,426.67 v1@3371,631
  other v1: 3368.5,626
Net1_3: 1.3 LT3.3 LT4.2 | length 2016
  Top Layer w10: 1.3@2771,526.67 2940.33,696 3256,696 ; LT3.3@3786,706 3727.59,706 3717.59,716 3676,716 3596,636 3596,551.86 3590.14,546 3276,546 3256,566 3256,696 ; LT4.2@3786,1031 3704.65,1031 3629.65,956 3591,956 3551,916 3476,916 3256,696
Net1_4: 1.4 LT4.3 LT5.2 | length 2419.8
  Top Layer w10: 1.4@2771,426.67 2775.29,430.96 2775.29,465.29 2821,511 2821,548.39 2923.61,651 v1(3086,651) ; v1(3131,741) 3171,781 3277.72,781 3506,1009.28 LT5.2@3506,1131 ; v1(3356,726) 3451,726 3706,981 LT4.3@3786,981
  Bottom Layer w10: 1.4@2771,426.67 2815.33,471 3116,471 3356,711 v1(3356,726) ; v1(3086,651) 3131,696 v1(3131,741)
Net1_5: 1.5 LT5.3 LT6.2 | length 2170.2
  Top Layer w10: 1.5@2671,526.67 2671,536 3066,931 3210.14,931 3216,936.86 LT6.2@3216,1131 ; v1(3226,741) 3266,741 3556,1031 LT5.3@3556,1131
  Bottom Layer w10: 1.5@2671,526.67 2675.29,530.96 2675.29,565.29 2726,616 3026,616 3041,601 3136,601 3226,691 v1(3226,741)
Net1_6: 1.6 LT6.3 LT7.2 | length 1810.1
  Top Layer w10: 1.6@2671,426.67 2726,481.67 2726,541 2926,741 v1(3041,741) 3106,806 3240.14,806 3246,811.86 3246,1051 3271,1076 3271,1089.18 3270.78,1089.39 3270.78,1126.22 LT6.3@3266,1131 ; v1(2786,741) 2786,836 2941,991 LT7.2@2941,1131
  Bottom Layer w10: v1(2786,741) v1(3041,741)
Net1_7: 1.7 LT7.3 LT8.2 | length 1457.5
  Top Layer w10: LT8.2@2666,1131 2666,756 2606,696 2606,616 2571,581 1.7@2571,526.67 2726.71,682.38 2787.38,682.38 2886,781 2886,841.67 2991,946.67 LT7.3@2991,1131
Net1_8: 1.8 LT8.3 LT9.2 | length 1417
  Top Layer w10: LT9.2@2391,1131 2391,941 2461,871 v1(2461,766) ; v1@2706,731 2711.22,741 2711.22,1126.22 LT8.3@2716,1131
  Bottom Layer w10: v1(2461,766) 2496,731 2706,731 2621,646 2621,476.67 1.8@2571,426.67
  other v1: 2706,727
Net1_9: 1.9 LT9.3 LT10.2 | length 1340.5
  Top Layer w10: LT10.2@2116,1131 2116,951 v1(2331,736) ; LT9.3@2441,1131 2441,976 2516,901 v1@2516,672 ; 1.9@2471,526.67 2510,565.67 v1(2510,672)
  Bottom Layer w10: v1(2331,736) 2416,736 2476,676 v1@2511,676
Net1_10: 1.10 LT10.3 LT11.2 | length 1690.3
  Top Layer w10: LT11.2@1841,1131 1841,986 2111,716 v1(2176,716) ; LT10.3@2166,1131 2166,961 2411,716 2411,686.86 2413.35,684.51 2413.35,668.65 2421,661 2421,476.67 1.10@2471,426.67
  Bottom Layer w10: v1(2176,716) 2231,661 v1@2421,661
  other v1: 2421,656
Net1_11: 1.11 LT11.3 LT12.2 | length 1941.9
  Top Layer w10: LT12.2@1566,1131 1566,1061 1941,686 v1(1996,686) ; LT11.3@1891,1131 1891,981 2111,761 2236,761 2371,626 v1(2371,601) 1.11@2371,526.67
  Bottom Layer w10: v1(1996,686) 2081,601 v1(2371,601)
Net1_12: 1.12 LT12.3 LT13.2 | length 2410.6
  Top Layer w10: LT13.2@1356,971 1486,971 1846,611 2225.14,611 2231,605.14 2231,501 2250.33,481.67 2316,481.67 ; LT12.3@1616,1131 1616,1041 1656,1001 1686,1001 1961,726 2071,726 2131,666 2281,666 2316,631 2316,481.67 ; 1.12@2371,426.67 2316,481.67
Net1_13: 1.13 LT13.3 LT14.2 | length 1910.3
  Top Layer w10: LT14.2@1356,706 1521,706 1706,521 v1@1846,521 ; LT13.3@1356,1021 1491,1021 1731,781 1766,781 v1@1856,691 ; v1@1851,686 1853,691 v1@1856,691 ; 1.13@2271,526.67 2271,606 2236,641 1906,641 v1@1856,691
  Bottom Layer w10: v1@1846,521 1851,522 v1@1851,686
  other v1: 1848,519 1854,687
Net1_14: 1.14 LT14.3 LT15.2 | length 2170.2
  Top Layer w10: LT15.2@1356,431 1851,431 v1(1866,416) ; LT14.3@1356,756 1651,756 1841,566 2205.14,566 2211,560.14 2211,486.67 1.14@2271,426.67 2271,326 2251,306 v1(2046,306)
  Bottom Layer w10: v1(1866,416) 1976,306 v1(2046,306)
Net1_15: 1.15 LT15.3 LT16.2 | length 1963.3
  Top Layer w10: LT16.2@1356,156 1781,156 2006,381 2215.14,381 2221,386.86 2221,436 2171,486 1.15@2171,526.67 2161.67,526.67 2106,471 1382.82,471 1372.82,481 LT15.3@1356,481
Net1_16: 1.16 LT16.3 | length 910.5
  Top Layer w10: LT16.3@1356,206 1574.41,206 1579.41,201 1781,201 2006.67,426.67 1.16@2171,426.67
Net*1_2: "Isolated DC/DC1.5" *1.2 | length 113.6
  Top Layer w30: 4774,1324 *1.2@4774,1429 *1.2@4780.06,1422.94
NetC84_1: C84.1 R13.1 R14.1 | length 229.4
  Bottom Layer w10: R14.1@2231,3008 2238.87,3008 2287.25,3056.38 2311.38,3056.38 C84.1@2330,3075 2427,3075 R13.1@2431,3079
NetC86_1: C86.1 Crystal_1.3 PIC1.40 | length 427.9
  Top Layer w8: v1@1650.96,3203.04 1650.96,3217.73 1606.24,3262.45 Crystal_1.3@1606.24,3274.26 1622.5,3258 PIC1.40@1791.61,3258
  Bottom Layer w8: C86.1@1604.02,3304.63 1607.95,3304.63 1630.53,3282.06 1630.53,3278.12 1659,3249.65 1659,3195 v1@1650.96,3203.04
  other v1: 1653,3195
NetC87_2: C87.2 Crystal_1.1 PIC1.39 | length 684.2
  Top Layer w8: v1(1371,3449) 1492.13,3449 1510.57,3430.56 Crystal_1.1@1511.76,3431.74 1511.76,3419.93 1561,3370.69 1561,3336.69 1565.69,3332 1653,3332 1707.31,3277.69 PIC1.39@1791.61,3277.69
  Bottom Layer w10: v1(1371,3449) 1440.45,3449 1505.08,3384.37 C87.2@1509.02,3384.37
NetC88_1: C88.1 PIC1.56 | length 296.8
  Top Layer w8: PIC1.56@1956.96,3072.96 1956.96,2972.04 v1(2016,2913)
  Bottom Layer w8: v1(2016,2913) 2019,2916 2019,2848.37 2019.49,2847.88 2019.49,2843.94 2042.06,2821.37 C88.1@2046,2821.37
NetDC/DC1_1: DC/DC1.1 DIODE1.K L1.1 | length 1481.5
  Top Layer w20: L1.1@2983,4159 3009,4159 3009,4157.86 DC/DC1.1@3460.92,4157.86 3623.86,4157.86 3739,4273 4048,4273 4207,4114 4242,4114 4276,4080 DIODE1.K@4276,4020.26
NetDC/DC2_1: DC/DC2.1 DIODE3.K L2.1 | length 1136.2
  Top Layer w20: DC/DC2.1@5117.92,3459.86 5180,3459.86 5210,3429.86 5210,3319 5263,3266 5263,3224 5496.6,2990.4 5521.34,2990.4 5574,2937.74 5574,2706.86 5568.14,2701 L2.1@5433,2701
NetESP32_23: ESP32.23 R12.1 | length 236.4
  Top Layer w10: v1(748,2621) 765.31,2621 842.71,2543.6 ESP32.23@842.71,2531.79
  Bottom Layer w10: v1(748,2621) 748,2716 R12.1@750,2718
NetESP32_24: ESP32.24 R10.1 | length 200.2
  Top Layer w10: v1(876,2611) 876,2600.18 892.71,2583.47 ESP32.24@892.71,2531.79
  Bottom Layer w10: R10.1@859,2718 859,2628 v1(876,2611)
NetESP32_34: ESP32.34 ESP_Prog.1 | length 880.4
  Top Layer w10: ESP32.34@1012,3031 1024.72,3043.72 1085.72,3043.72 1183,3141 1183,3446.54 1204.43,3467.96 ESP_Prog.1@1204.43,3796
NetLT1_6: LT1.6 R16.1 | length 153.7
  Top Layer w10: LT1.6@3996,156 v1(4066,156)
  Bottom Layer w10: v1(4066,156) R16.1@4149.66,156
NetLT2_6: LT2.6 R17.1 | length 153.7
  Top Layer w10: LT2.6@3996,431 v1(4066,431)
  Bottom Layer w10: v1(4066,431) R17.1@4149.66,431
NetLT3_6: LT3.6 R18.1 | length 153.7
  Top Layer w10: LT3.6@3996,706 v1(4066,706)
  Bottom Layer w10: v1(4066,706) R18.1@4149.66,706
NetLT4_6: LT4.6 R19.1 | length 153.7
  Top Layer w10: LT4.6@3996,981 v1(4066,981)
  Bottom Layer w10: v1(4066,981) R19.1@4149.66,981
NetLT5_6: LT5.6 R20.1 | length 148.7
  Top Layer w10: LT5.6@3556,1341 v1(3556,1411)
  Bottom Layer w10: v1(3556,1411) R20.1@3556,1489.66
NetLT6_6: LT6.6 R21.1 | length 148.7
  Top Layer w10: LT6.6@3266,1341 v1(3266,1411)
  Bottom Layer w10: v1(3266,1411) R21.1@3266,1489.66
NetLT7_6: LT7.6 R22.1 | length 148.7
  Top Layer w10: LT7.6@2991,1341 v1(2991,1411)
  Bottom Layer w10: v1(2991,1411) R22.1@2991,1489.66
NetLT8_6: LT8.6 R23.1 | length 148.7
  Top Layer w10: LT8.6@2716,1341 v1(2716,1411)
  Bottom Layer w10: v1(2716,1411) R23.1@2716,1489.66
NetLT9_6: LT9.6 R24.1 | length 148.7
  Top Layer w10: LT9.6@2441,1341 v1(2441,1406)
  Bottom Layer w10: v1(2441,1406) R24.1@2441,1489.66
NetLT10_6: LT10.6 R26.1 | length 148.7
  Top Layer w10: LT10.6@2166,1341 v1(2166,1411)
  Bottom Layer w10: v1(2166,1411) R26.1@2166,1489.66
NetLT11_6: LT11.6 R28.1 | length 148.7
  Top Layer w10: LT11.6@1891,1341 v1(1891,1411)
  Bottom Layer w10: v1(1891,1411) R28.1@1891,1489.66
NetLT12_6: LT12.6 R30.1 | length 148.7
  Top Layer w10: LT12.6@1616,1341 v1(1616,1411)
  Bottom Layer w10: v1(1616,1411) R30.1@1616,1489.66
NetLT13_6: LT13.6 R25.1 | length 158.7
  Top Layer w10: v1(1071,1021) LT13.6@1146,1021
  Bottom Layer w10: R25.1@987.34,1021 v1(1071,1021)
NetLT14_6: LT14.6 R27.1 | length 158.7
  Top Layer w10: v1(1071,756) LT14.6@1146,756
  Bottom Layer w10: R27.1@987.34,756 v1(1071,756)
NetLT15_6: LT15.6 R29.1 | length 158.7
  Top Layer w10: v1(1071,481) LT15.6@1146,481
  Bottom Layer w10: R29.1@987.34,481 v1(1071,481)
NetLT16_6: LT16.6 R31.1 | length 160.7
  Top Layer w10: v1(1076,211) 1078.5,208.5 1143.5,208.5 LT16.6@1146,206
  Bottom Layer w10: R31.1@987.34,211 v1(1076,211)
PGEC1: PIC1.15 PIC_PROG_1.5 | length 846.1
  Top Layer w10: PIC1.15@2142,3376.11 2215.13,3376.11 v1(2215.26,3376.24)
  Bottom Layer w10: PIC_PROG_1.5@1771.15,3790 1768,3786.85 1768,3529 1920.76,3376.24 v1(2215.26,3376.24)
PGED1: PIC1.16 PIC_PROG_1.4 | length 721.2
  Top Layer w8: PIC1.16@2142,3395.8 2153.22,3395.8 2174.96,3417.54 2174.96,3432.96 v1(2183,3441)
  Bottom Layer w8: PIC_PROG_1.4@1869.57,3790 1973.57,3686 2206.31,3686 2228,3664.31 2228,3486 v1(2183,3441)
PICout-ESPin: PIC1.45 R12.2 | length 1324.7
  Top Layer w8: v1(1746,3055) 1746,3126.03 1774.37,3154.4 ; 1774.39,3154.4 1779.57,3159.58 PIC1.45@1791.61,3159.58
  Bottom Layer w8: R12.2@750,2793 750,2946 770,2966 1247,2966 1331,3050 1741,3050 v1(1746,3055)
V_Ref: ADC1.11 ADC2.11 C11.2 C93.2 C94.2 Vref_1.5 | length 4101
  Bottom Layer w10: ADC2.11@531.46,2075.83 444.54,2075.83 C94.2@443.37,2077 443.37,1918.86 449.23,1913 738,1913 856,1795 1877,1795 2207.86,2125.86 2378.14,2125.86 2384,2120 Vref_1.5@2384,2099 2386,2097 2575,2097 ; C11.2@2589,1902.37 2589,2083 2575,2097 ; ADC1.11@3874.82,2085.83 3874.82,2094.71 3872.53,2097 3538,2097 2575,2097
pads on no net: "Isolated DC/DC1.6" "Isolated DC/DC1.7" "Isolated DC/DC1.8" "Isolated DC/DC1.9" "Isolated DC/DC1.10" "Isolated DC/DC1.11" "Isolated DC/DC1.12" ADC1.16 ADC2.16 ESP32.4 ESP32.5 ESP32.7 ESP32.8 ESP32.9 ESP32.10 ESP32.11 ESP32.12 ESP32.13 ESP32.14 ESP32.16 ESP32.17 ESP32.18 ESP32.19 ESP32.20 ESP32.21 ESP32.22 ESP32.26 ESP32.27 ESP32.28 ESP32.29 ESP32.30 ESP32.31 ESP32.32 ESP32.33 ESP32.36 ESP32.37 OPIS2.3 OPIS2.4 OPIS2.5 OPIS2.6 OPIS2.7 OPIS2.8 OPIS2.11 OPIS2.12 OPIS2.13 PIC1.1 PIC1.2 PIC1.3 PIC1.4 PIC1.5 PIC1.6 PIC1.8 PIC1.11 PIC1.12 PIC1.13 PIC1.14 PIC1.17 PIC1.18 PIC1.21 PIC1.22 PIC1.23 PIC1.24 PIC1.27 PIC1.28 PIC1.29 PIC1.30 PIC1.33 PIC1.34 PIC1.36 PIC1.37 PIC1.42 PIC1.46 PIC1.47 PIC1.48 PIC1.49 PIC1.51 PIC1.52 PIC1.53 PIC1.54 PIC1.55 PIC1.59 PIC1.60 PIC1.61 PIC1.62 PIC1.63 PIC1.64 PIC_PROG_1.6 U1.1 U1.5 U1.7 U1.8 Vref_1.1

## Polygon pours and split planes (outlines as drawn)
+3V3 on Power (split plane): 5837.9,3588.68 5837.9,768.32 5095.68,26.1 4476.07,26.1 4476.07,583.76 4630.24,737.93 4631,737.93 4633.94,738.22 4636.28,738.93 4957,738.93 4959.94,739.22 4962.77,740.07 4965.37,741.47 4967.66,743.34 5135.66,911.34 5137.53,913.63 5138.93,916.23 5139.78,919.06 5140.07,922 5140.07,2195 5139.78,2197.94 5138.93,2200.77 5137.53,2203.37 5135.66,2205.66 4931.66,2409.66 4929.37,2411.53 4926.77,2412.93 4923.94,2413.78 4921,2414.07 23.1,2414.07 23.1,3589.68 773.32,4339.9 5086.68,4339.9
+5 on Power (split plane): 5109.93,2188.76 5109.93,928.24 4950.76,769.07 4632,769.07 4629.06,768.78 4626.72,768.07 4624,768.07 4621.06,767.78 4618.23,766.93 4615.63,765.53 4613.34,763.66 4450.34,600.66 4448.47,598.37 4447.07,595.77 4446.22,592.94 4445.93,590 4445.93,26.1 764.32,26.1 23.1,767.32 23.1,2383.93 4914.76,2383.93
GND_L on Ground (split plane): 5837.9,3588.68 5837.9,768.32 5095.68,26.1 4477.07,26.1 4477.07,587.76 4628.24,738.93 4957,738.93 4959.94,739.22 4962.77,740.07 4965.37,741.47 4967.66,743.34 5134.66,910.34 5136.53,912.63 5137.93,915.23 5138.78,918.06 5139.07,921 5139.07,2197 5138.78,2199.94 5137.93,2202.77 5136.53,2205.37 5134.66,2207.66 4935.66,2406.66 4933.37,2408.53 4930.77,2409.93 4927.94,2410.78 4925,2411.07 23.1,2411.07 23.1,3589.68 773.32,4339.9 5086.68,4339.9
GND_H on Ground (split plane): 5108.93,2190.76 5108.93,927.24 4950.76,769.07 4622,769.07 4619.06,768.78 4616.23,767.93 4613.63,766.53 4611.34,764.66 4451.34,604.66 4449.47,602.37 4448.07,599.77 4447.22,596.94 4446.93,594 4447.08,592.5 4446.93,591 4446.93,26.1 764.32,26.1 23.1,767.32 23.1,2380.93 4918.76,2380.93

## Keep-outs
Top Layer:
  lines w20: 312,3273 1020.84,3273 ; 313.18,3274.59 313.18,3506.59 ; 313.18,3505 1018.41,3505 ; 1021.41,3502 1021.41,3272.43 1023.84,3270
  lines w30: 0,2399 4922,2399 5124,2197 5124,921 4955,752 4620,752 4462,594 4462,1
Bottom Layer:
  lines w30: 0,2398 4922,2398 5123,2197 5123,920 4956,753 4620,753 4462,595 4462,0

## Other copper
Power (plane layer: these items are gaps in the copper):
  lines w30: 0,2399 4921,2399 5125,2195 5125,922 4957,754 4632,754 4631,753 4624,753 4461,590 4461,17
Ground (plane layer: these items are gaps in the copper):
  lines w30: 0,2396 4925,2396 5124,2197 5124,921 4957,754 4622,754 4462,594 ; 4462,2 4462,591